# Altium PCB Set Timer.PcbDoc
Units mm, origin at the board's own origin, x right, y up, seen from the top; angles counter-clockwise.
Board outline 45 x 45 mm, 2 copper layers (Top Layer, Bottom Layer), stack 1.1 mm thick; 17 components, 17 nets, 68 pads, 10 vias.
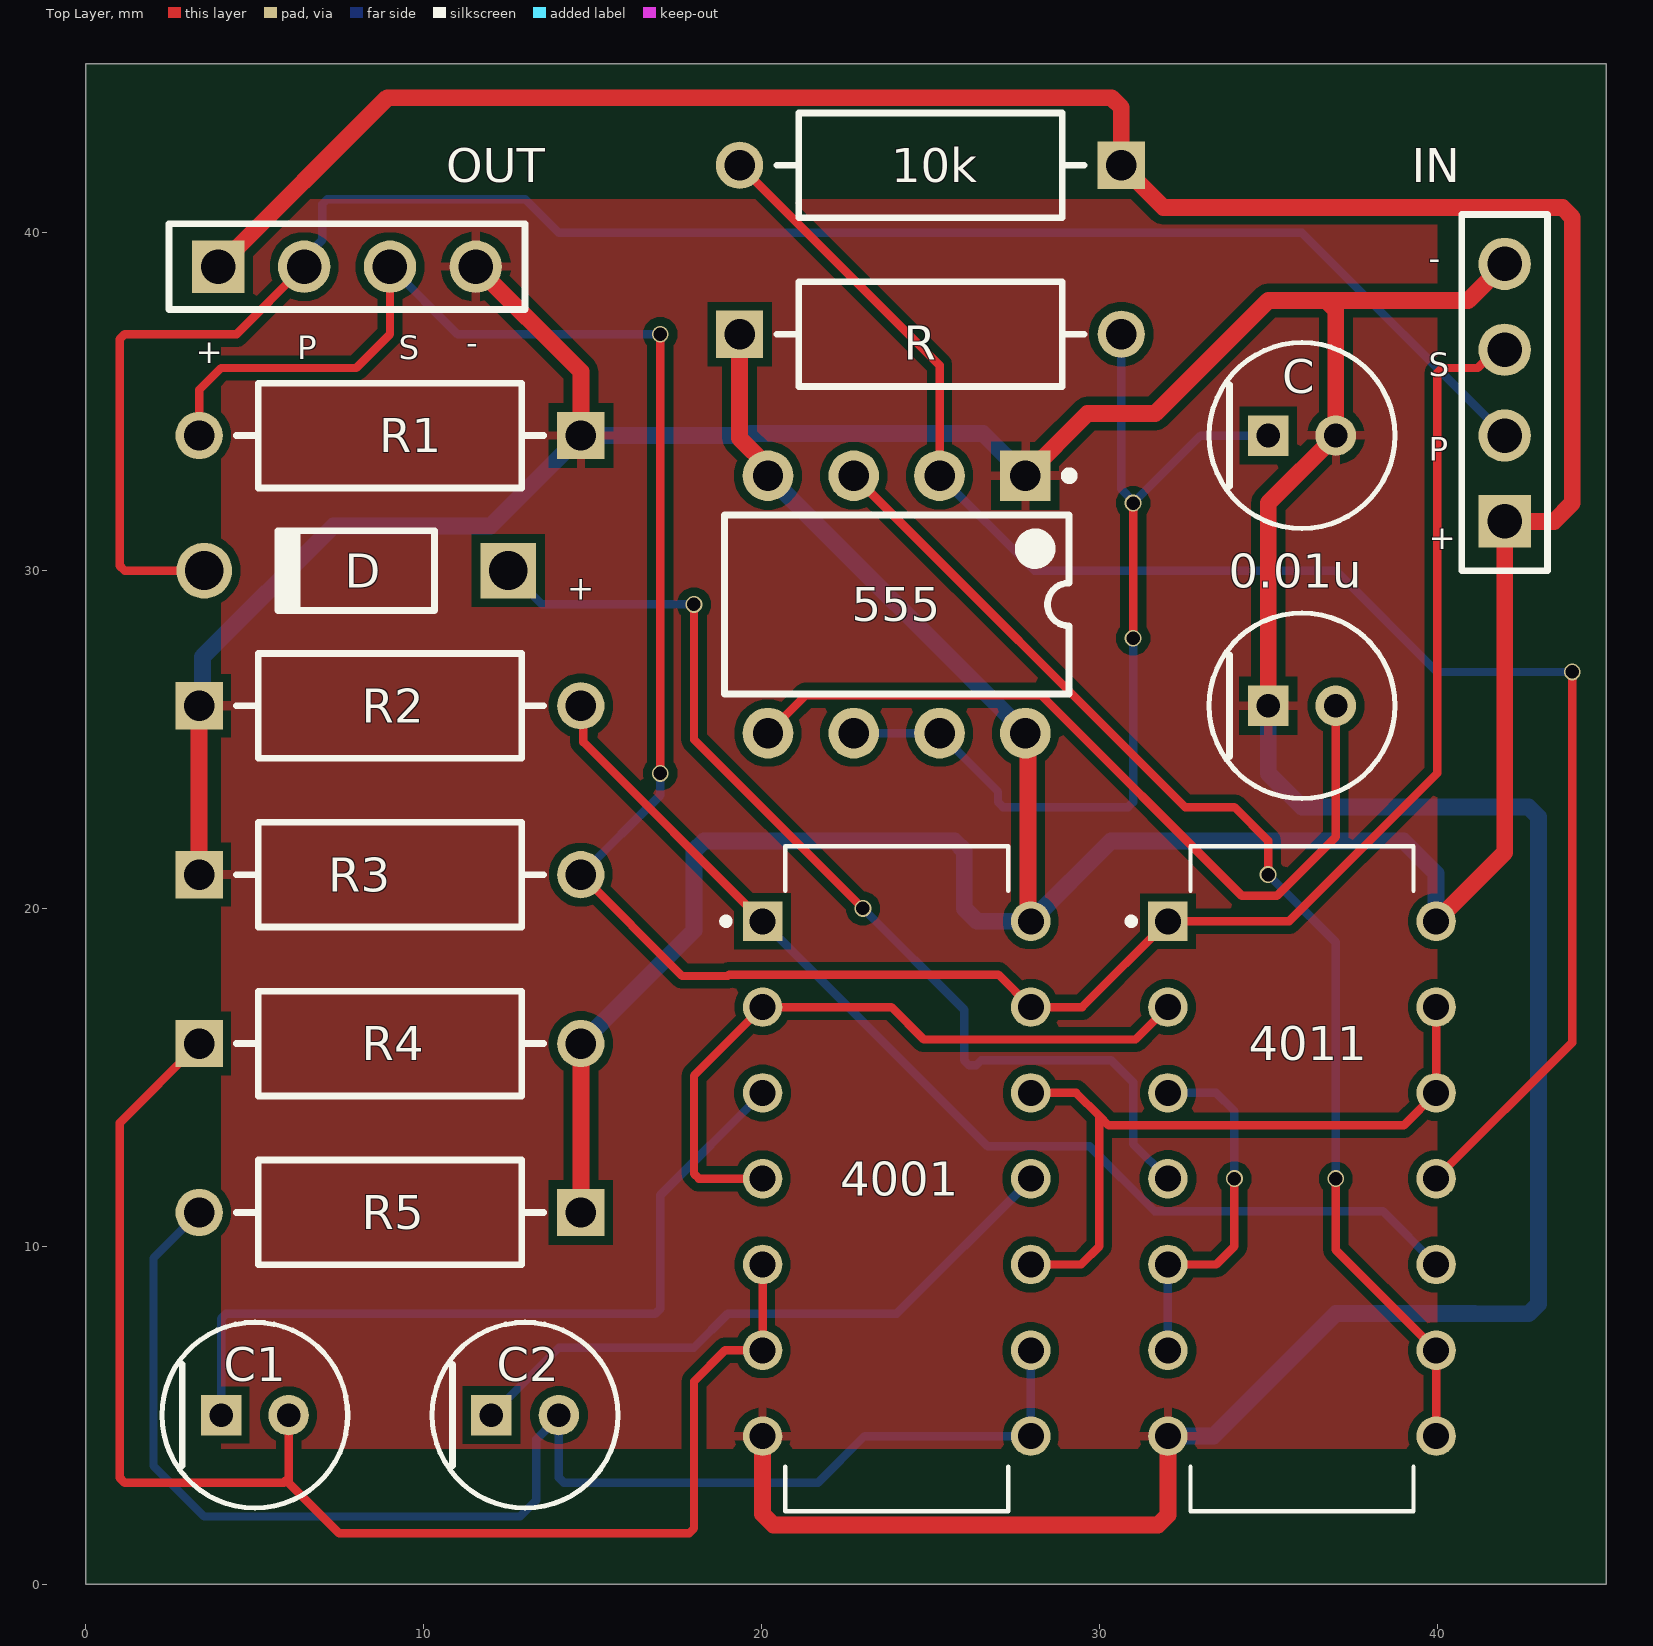
[diagram p0: Top Layer view]
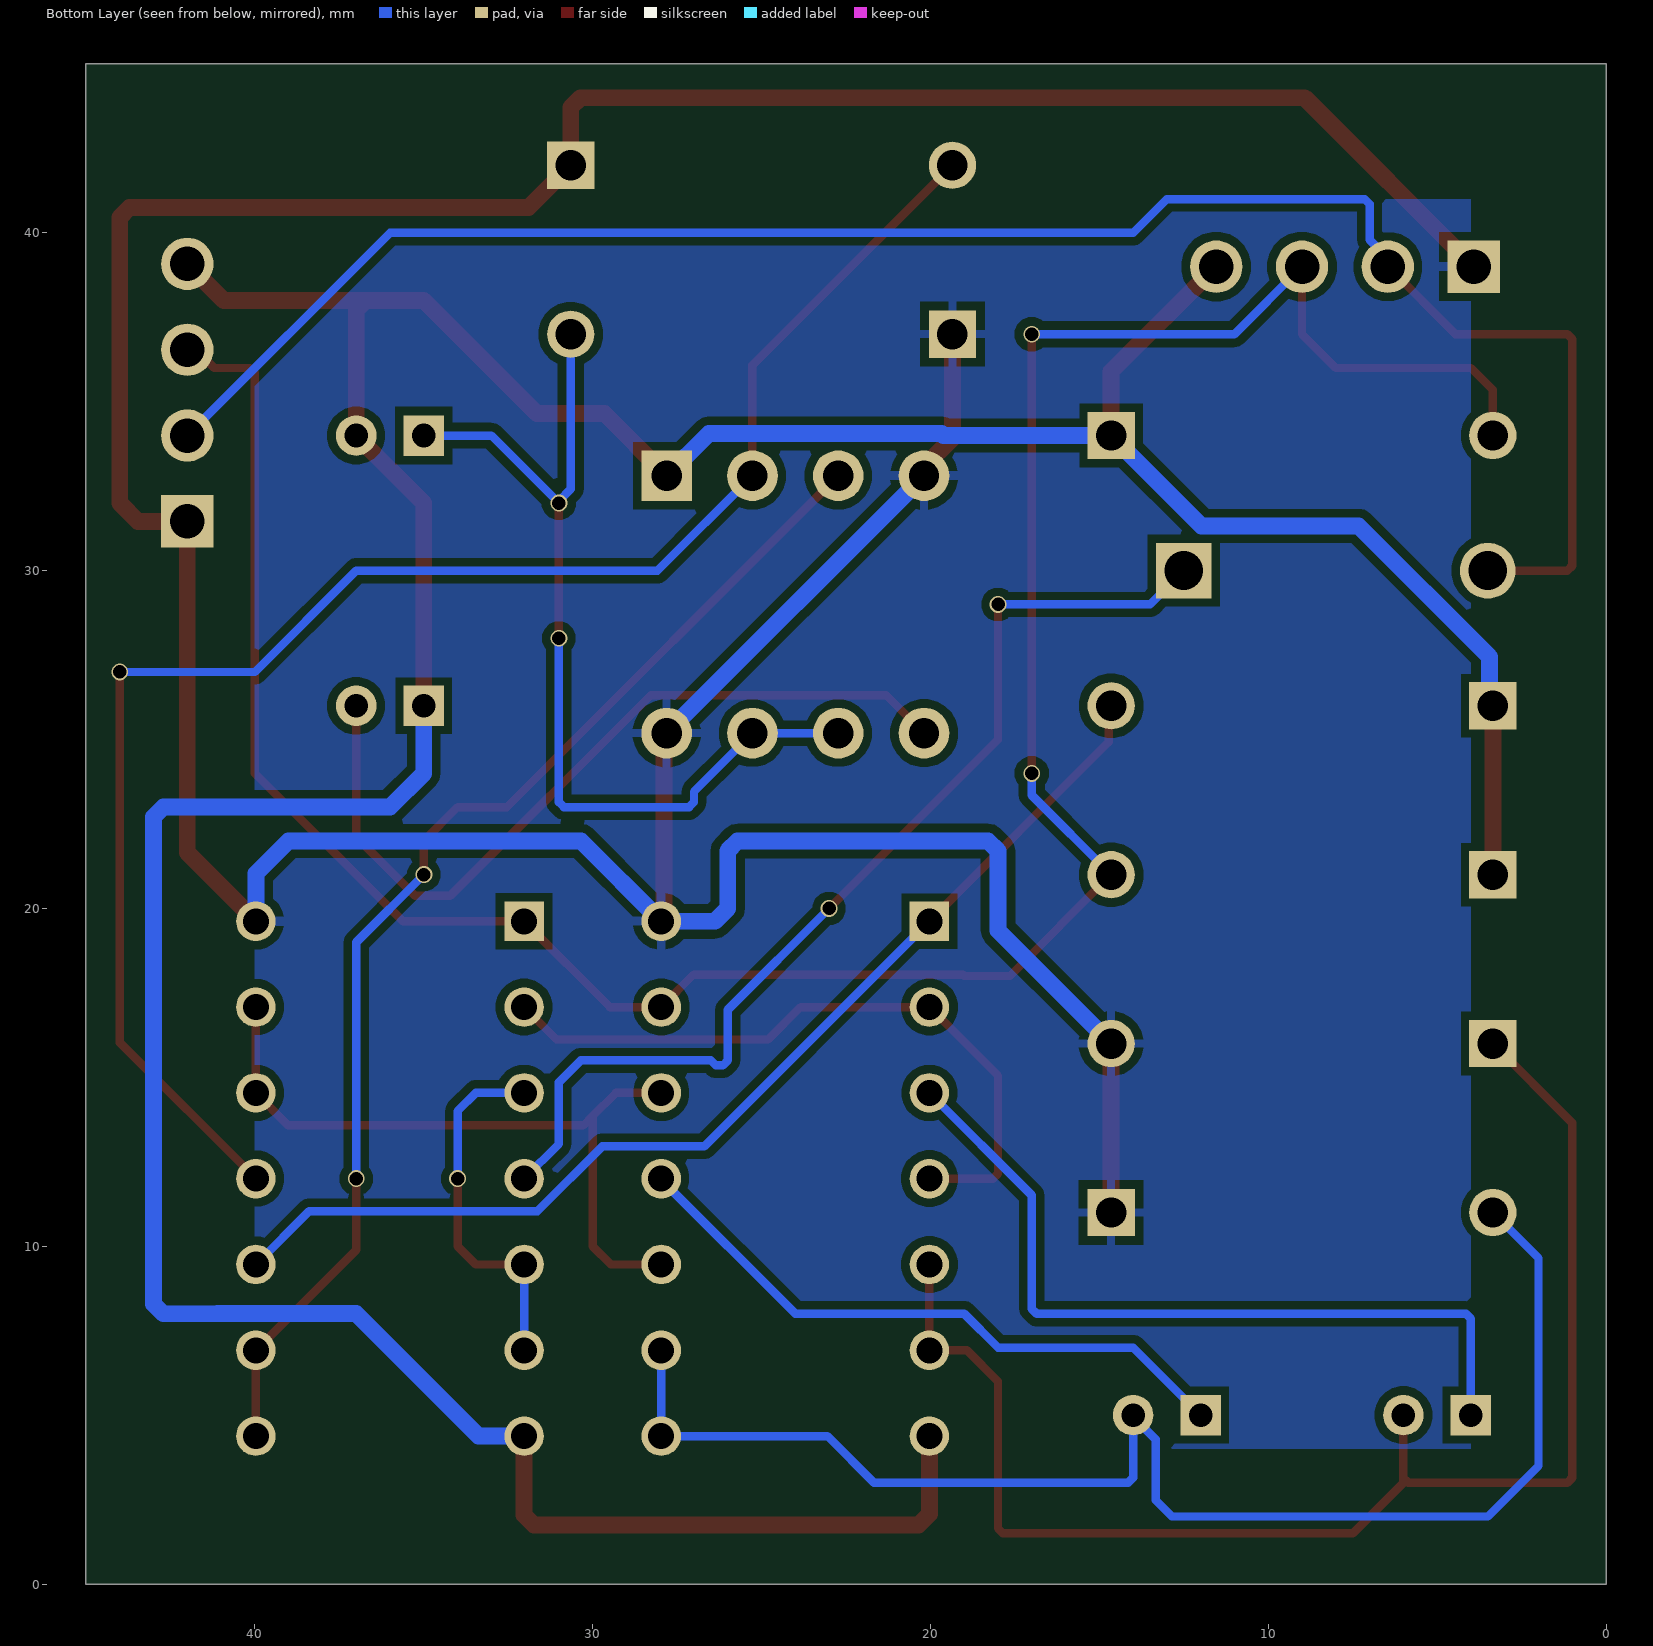
[diagram p1: Bottom Layer view, seen from below]
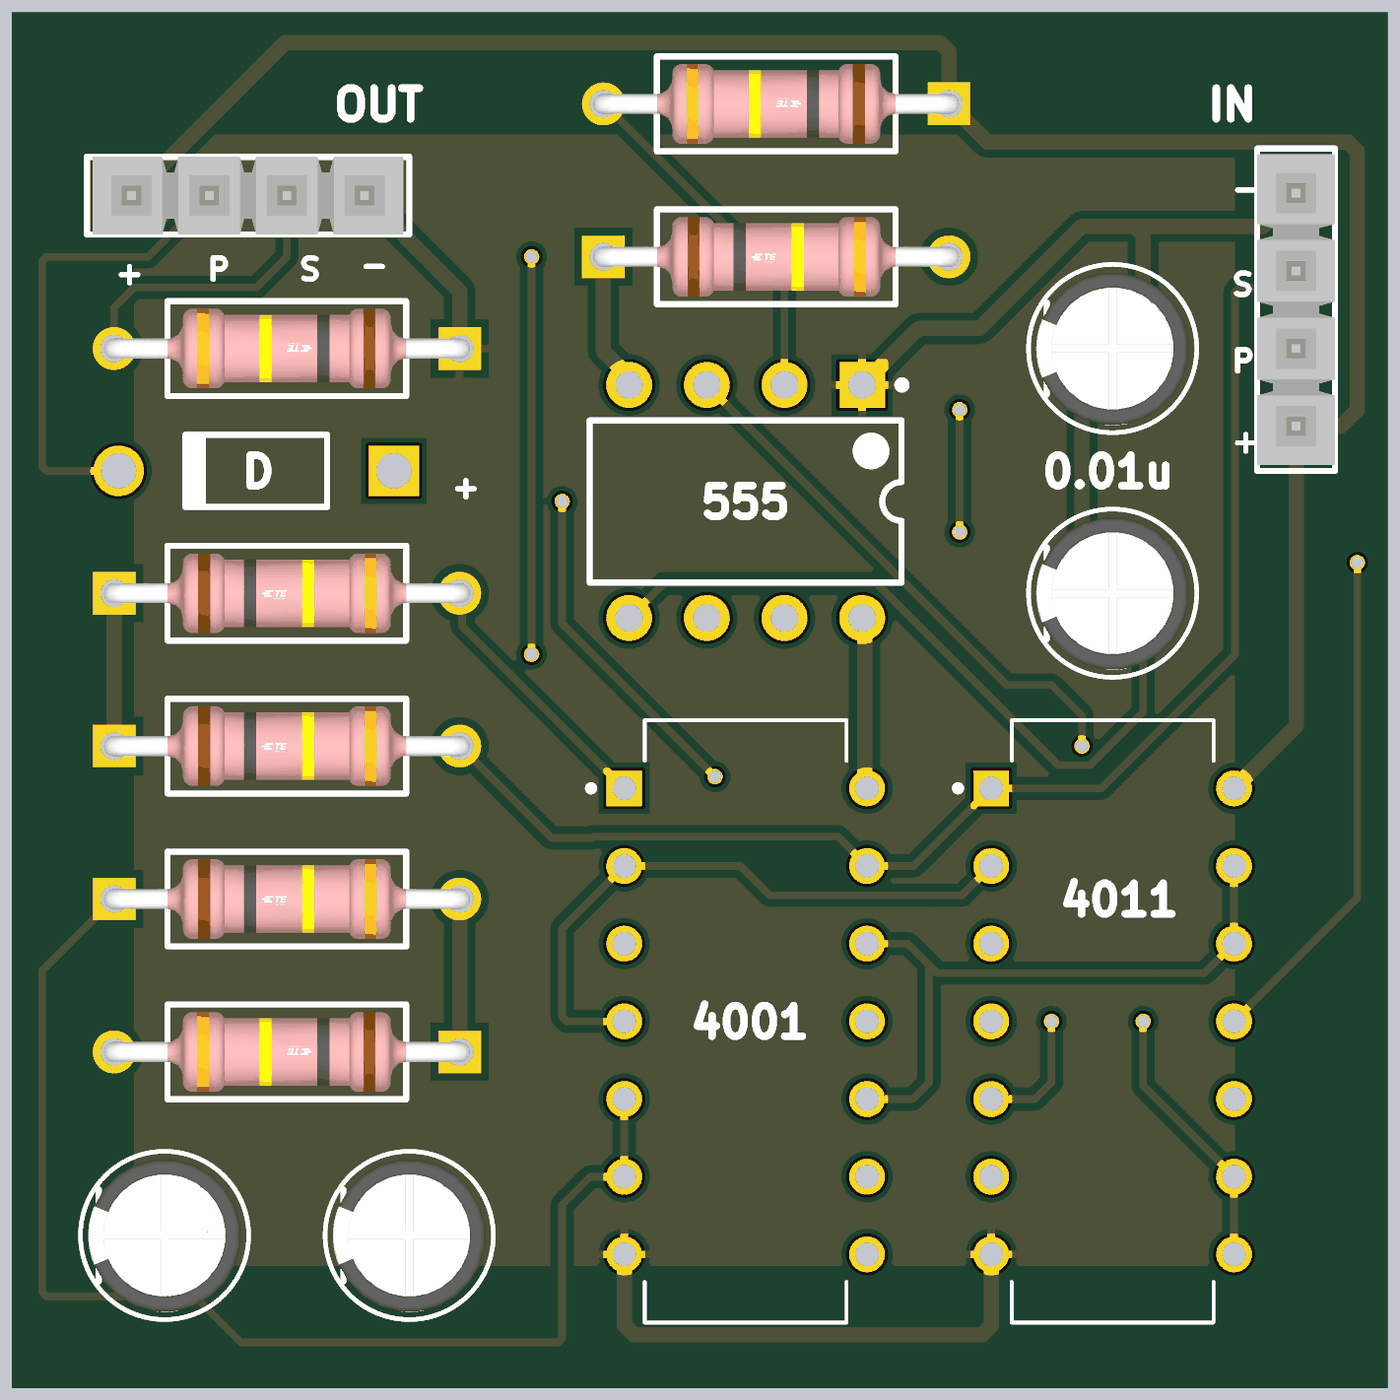
[diagram p2: 3D render of the assembled board from above, using the file's embedded part models]

## Layer stack, top to bottom
Top Solder: solder mask 0.0254, SM-001, Dk 4
Top Layer: signal copper 0.1
Dielectric 1: dielectric 0.9, FR-4, Dk 4.8
Bottom Layer: signal copper 0.1
Bottom Solder: solder mask 0.0254, SM-001, Dk 4

## Board outline
0,0 45,0 45,45 0,45

## Design rules (kind name [scope] priority, off if disabled: settings)
Clearance [All] p1: gap=0.25 ignorepadtopadclearanceinfootprint=FALSE
PolygonConnect [All] p1: connectstyle=Relief reliefconductorwidth=0.254 reliefentries=4 polygonreliefangle="90 Angle" airgapwidth=0.254
RoutingVias [All] p1: holewidth=0.4 width=0.5 viastyle="Through Hole" minholewidth=0.4 minwidth=0.5 maxholewidth=0.4 maxwidth=0.5
SolderMaskExpansion [All] p1: expansion=0.102 istentingtop=FALSE
Width Width_Power [(InNet('GND') OR InNet('VCC'))] p1: maxlimit=0.6 minlimit=0.3 preferedwidth=0.5
Width [All] p2: maxlimit=0.3 minlimit=0.2 preferedwidth=0.25
30 further rules are at their usual default settings.

## Components (designator, comment, footprint, x,y, rotation, side; value= is the part's Value field where it differs from the comment)
0.01u "EEUHD1H330" FP-RAD-TH-D_5_0_5-L_11_1-MFG 36,26 r0 top
10k "RR01J100KTB" FP-RR01-MFG 25,42 r180 top
555 "NE555P" P0008A 24,29 r270 top
4001 "CD4001BE" DIP794W45P254L1969H508Q14 24,12 r0 top
4011 "CD4011BE" DIP794W45P254L1969H508Q14 36,12 r0 top
C "EEUHD1H330" FP-RAD-TH-D_5_0_5-L_11_1-MFG 36,34 r0 top
C1 "EEUHD1H330" FP-RAD-TH-D_5_0_5-L_11_1-MFG 5,5 r0 top
C2 "EEUHD1H330" FP-RAD-TH-D_5_0_5-L_11_1-MFG 13,5 r0 top
D "1N4001-T" DIOD-DO-41-P-2_V 8,30 r180 top
IN "TSW-104-08-L-S" SMTC-TSW-104-08-X-S 42,31.46 r90 top
OUT "TSW-104-08-L-S" SMTC-TSW-104-08-X-S 3.92,39 r0 top
R "RR01J100KTB" FP-RR01-MFG 25,37 r0 top
R1 "RR01J100KTB" FP-RR01-MFG 9,34 r180 top
R2 "RR01J100KTB" FP-RR01-MFG 9,26 r0 top
R3 "RR01J100KTB" FP-RR01-MFG 9,21 r0 top
R4 "RR01J100KTB" FP-RR01-MFG 9,16 r0 top
R5 "RR01J100KTB" FP-RR01-MFG 9,11 r180 top

## Footprints (in the part's own frame and the unit in brackets; to place one, negate y for a bottom-side part, rotate by r counter-clockwise, add the part's x,y. Pads: shape width x height; smd on the part's side, far side on the other; paste and mask are expansions set on the pad)
DIOD-DO-41-P-2_V [mm] "2-Leads, Axial Lead, Body 4.635x2.36mm, Pin Spacing 9mm"
  rect 1.65x1.65 hole 1.15: 1(-4.5,0)
  round 1.65 hole 1.15: 2(4.5,0)
  silkscreen extent -2.32,-1.18 2.32,1.18, body extent -4.93,-1.18 4.93,1.18, height 2.35
DIP794W45P254L1969H508Q14 [mm]
  rect 1.17x1.17 hole 0.77: 1(-3.97,7.62)
  round 1.17 hole 0.77: 2(-3.97,5.08) 3(-3.97,2.54) 4(-3.97,0) 5(-3.97,-2.54) 6(-3.97,-5.08) 7(-3.97,-7.62) 8(3.97,-7.62) 9(3.97,-5.08) 10(3.97,-2.54) 11(3.97,0) 12(3.97,2.54) 13(3.97,5.08) 14(3.97,7.62)
  silkscreen extent -5.15,-9.84 3.3,9.84
FP-RAD-TH-D_5_0_5-L_11_1-MFG [mm]
  rect 1.2x1.2 hole 0.7 paste-1000 mask+0: 1(-1,0)
  round 1.2 hole 0.7 paste-1000 mask+0: 2(1,0)
  silkscreen extent -2.75,-2.75 2.75,2.75, body extent -2.85,-2.85 2.85,2.85, height 0.25
FP-RR01-MFG [mm]
  rect 1.4x1.4 hole 0.9 paste-1000 mask+0: 1(-5.65,0)
  round 1.4 hole 0.9 paste-1000 mask+0: 2(5.65,0)
  silkscreen extent -4.55,-1.55 4.55,1.55, body extent -6.45,-1.65 6.45,1.65, height 0.25
P0008A [mm] "DIP, 8-Leads, Body 10.15x6.6mm, Pitch 2.54mm"
  rect 1.5x1.5 hole 0.9: 1(-3.81,3.81)
  round 1.5 hole 0.9: 2(-3.81,1.27) 3(-3.81,-1.27) 4(-3.81,-3.81) 5(3.81,-3.81) 6(3.81,-1.27) 7(3.81,1.27) 8(3.81,3.81)
  silkscreen extent -3.93,-5.1 2.65,5.24, body extent -3.95,-5.07 3.95,5.07, height 5.08
SMTC-TSW-104-08-X-S [mm] ".025 SQ Post Terminal Strip Assembly, 1x4 Pins, Vertical, 2.54mm Pitch, Male"
  rect 1.55x1.55 hole 1.02: 1(0,0)
  round 1.55 hole 1.02: 2(2.54,0) 3(5.08,0) 4(7.62,0)
  silkscreen extent -1.46,-1.27 9.08,1.27, body extent -1.27,-1.27 8.89,1.27, height 8.38

## Part data
0.01u C C1 C2: library part CMP-05427-001662-1, "Aluminum Electrolytic Capacitors (Radial Lead Type) AEC-Q200 Qualified 33uF ±20% 50V", Capacitance=33uF, Case/Package=Radial, Max Operating Temperature=105°C, Min Operating Temperature=-55°C, Package Quantity=200, Ripple Current=90mA, Tolerance=20%, Voltage=50V, Construction=RADIAL, Diameter=5mm, Height=11mm, Height - Seated (Max)=0.492inch, Lead Diameter=0.5mm, Lead Pitch=2.5mm, Lead/Base Style=Straight, Length=11mm, Life (Hours)=1000Hour, Mount="Through Hole", Packaging=Bulk, Polarity=Polar, REACH SVHC="No SVHC", Ripple Current (AC)=90mA, RoHS Compliant=Yes, Series=HD, Termination=Radial, Voltage Rating=50V, Voltage Rating (DC)=50V
10k R R1 R2 R3 R4 R5: library part CMP-03212-000008-1, "RES 100K OHM 5% 1W AXIAL", Case/Package=Metal, Max Operating Temperature=155°C, Min Operating Temperature=-55°C, Number of Resistors=1, Package Quantity=5000, Power Rating=1W, Resistance=100kR, Resistor Type="Power resistor", Temperature Coefficient=300ppm/°C, Tolerance=5%, Voltage Rating=350V, Diameter=2.6mm, ELV=Compliant, Length=6.8mm, Mount=Axial, Number of Terminations=2, Packaging="Ammo Pack", RoHS Compliant=Yes, Series=RR, Termination=Axial
555: library part CMP-2000-04954-1, "Precision Timer, 4.5 to 16 V, 0 to 70 degC, 8-Pin DIP, Pb-Free, Tube", Manufacturer=TexasInstruments, Maximum High Level Output Current=-200mA, Maximum Low Level Output Current=200mA, Operating Supply Voltage=5, Package=8PDIP, Package Description="8-Pin Double In-line Package, Body 9.59 x 6.35 mm, Pitch 2.54 mm", Package Reference=P8, Category=Timer, Datasheet URL=http://www.ti.com/general/docs/lit/getliterature.tsp?genericPartNumber=NE555&fileType=pdf, Datasheet Version="Rev. I, 09/2014", Manufacturer URL=http://www.ti.com/, Number of Internal Timers=1, Package URL=http://www.ti.com/lit/ml/mpdi001b/mpdi001b.pdf, Packaging=Rail/Tube, Rad Hard=No, Type=Standard
4001: "CMOS Quad 2-Input NOR Gate 14-PDIP -55 to 125", Package="PDIP-14 Texas Instruments", Availability=Unavailable, DigiKey-Purchase-URL=https://snapeda.com/shop?store=DigiKey&id=2748659, MF="Texas Instruments", Mouser-Purchase-URL=https://snapeda.com/shop?store=Mouser&id=2748659, MP=CD4001BE, Price=None, SnapEDA_Link=https://www.snapeda.com/parts/CD4001BE/Texas%20Instruments/view-part/2748659/?ref=snap, Texas_Instruments-Purchase-URL=https://snapeda.com/shop?store=Texas+Instruments&id=2748659
4011: Package=None, Availability=Unavailable, MP=CD4011BE, Price=None
D: library part CMP-0639-00006-2, "1.0 A Rectifier, 15 pF, 50 V, -65 to 150 degC, 2-Pin DO-41 Plastic, RoHS, Tape and Reel", Manufacturer="Diodes Inc", Max. Average Rectified Current IO (A)=1, Operating Temperature Range (degC)="-65 to 150", ComponentLink1Description="Manufacturer URL", ComponentLink1URL=http://diodes.com/, ComponentLink2Description=Datasheet, ComponentLink2URL=http://diodes.com/datasheets/ds28002.pdf, CT (pF)=15, DatasheetVersion="Rev. 8-2", Max. IFSM (A)=30, Max. IR (uA)=5, Mounting Technology="Through Hole", PackageDescription="2-Pin Axial Lead, Body 4.635 x 2.36 mm, Lead Spread 25.4 mm", PackageReference=DO-41-P-2, Packing="Tape and Reel", PartNumber=1N4001-T, RoHS=TRUE, VF (V)=1, VRRM (V)=50
IN OUT: library part CMP-1024-00358-1, "0.025\" SQ Post Header, Through-hole, Vertical, -55 to 125 degC, 2.54 mm Pitch, 4-Pin, Male, RoHS", Manufacturer=Samtec, Temperature Range="-55 to 125 degC", ComponentLink1Description="Manufacturer URL", ComponentLink1URL=http://www.samtec.com, ComponentLink2Description=Datasheet, ComponentLink2URL=http://www.samtec.com/documents/webfiles/pdf/TSW_TH.PDF, ComponentLink3Description="Package Specification", ComponentLink3URL=http://www.samtec.com/documents/webfiles/cpdf/TSW-XXX-XX-XXX-X-XX-XXX-MKT.pdf, DatasheetVersion=F-214, Mounting Technology=Through-hole, Orientation=Vertical, PackageDescription=".025[0.64] SQ. Post Terminal Strip Assembly", PackageReference=TSW-104-08-X-S, PackageVersion="DM, 8/1988", PartNumber=TSW-104-08-L-S, Pitch="2.54 mm", RoHS=True

## Via types
v1: diameter 0.5, hole 0.4, Top Layer to Bottom Layer, 10 vias

## Nets (pads, with @x,y where several pads share a name; then routed paths per layer and width w, separated by ;. In a path a pad name is that pad's centre, name@x,y a point inside that pad or via, vN(x,y) a via of type N, cw(c..) or ccw(c..) an arc to the next point about the centre after c; other vN are vias at no path point)
GND: 0.01u.1 555.1 4001.7 4011.7 C.2 IN.4 OUT.4 R1.1 R2.1 R3.1 | length 124.6
  Top Layer w0.5: R3.1 R2.1 ; OUT.4 14.65,35.89 R1.1 ; 4001.7 20.03,2.073 20.353,1.75 31.737,1.75 32.03,2.043 4011.7 ; 555.1 29.655,34.655 31.655,34.655 35,38 36.707,38 ; 0.01u.1 35,32 C.2 37,37.707 36.707,38 ; IN.4 40.92,38 36.707,38
  Bottom Layer w0.5: R2.1 3.45,26.1 3.45,27.45 7.325,31.325 11.975,31.325 R1.1 19.612,34 19.672,34.06 26.56,34.06 555.1 ; 4011.7 33.38,4.38 37.005,8.005 41.111,8.005 41.116,8 42.707,8 43,8.293 43,22.707 42.707,23 36,23 35,24 0.01u.1
Net0.01u_2: 0.01u.2 555.5 | length 24.3
  Top Layer w0.25: 555.5 21.315,26.315 28.276,26.315 34.214,20.377 35.257,20.377 37,22.12 0.01u.2
Net10k_2: 10k.2 555.2 4011.11 | length 49.4
  Top Layer w0.25: 10k.2 25.27,36.08 555.2 ; 4011.11 44,16.03 v1(44,27)
  Bottom Layer w0.25: 555.2 28.08,30 37,30 40,27 v1(44,27)
Net555_3: 555.3 4011.8 4011.9 | length 36.4
  Top Layer w0.25: 555.3 32.54,23 34,23 35,22 35,21.004 v1(34.998,21.002) ; v1(37,12) 37,9.89 4011.9 4011.8
  Bottom Layer w0.25: v1(34.998,21.002) 37,19 v1(37,12)
Net555_6: 555.6 555.7 C.1 R.2 | length 28.2
  Top Layer w0.25: v1(31,28) v1(31,32)
  Bottom Layer w0.25: 555.6 555.7 27,23.46 27,23.146 27.146,23 30.854,23 31,23.146 v1(31,28) ; R.2 30.65,32.418 31,32.068 v1(31,32) 33,34 C.1
Net4001_1: 4001.1 4011.10 R2.2 | length 32.8
  Top Layer w0.25: R2.2 14.725,25.925 14.725,24.925 4001.1
  Bottom Layer w0.25: 4001.1 26.69,12.96 29.712,12.96 31.632,11.04 38.39,11.04 4011.10
Net4001_2: 4001.2 4001.4 4011.2 | length 20.7
  Top Layer w0.25: 4001.4 18.146,12 18,12.146 18,15.05 4001.2 23.843,17.08 24.803,16.12 31.07,16.12 4011.2
Net4001_3: 4001.3 C1.1 | length 23.6
  Bottom Layer w0.25: C1.1 4,7.854 4.146,8 16.854,8 17,8.146 17,11.51 4001.3
Net4001_5: 4001.5 4001.6 C1.2 R4.1 | length 42.8
  Top Layer w0.25: R4.1 1,13.65 1,3.146 1.146,3 5.854,3 5.927,3.073 ; C1.2 6,3 7.5,1.5 17.854,1.5 18,1.646 18,6 18.92,6.92 4001.6 4001.5
Net4001_8: 4001.8 4001.9 C2.2 R5.2 | length 42
  Bottom Layer w0.25: R5.2 2,9.65 2,3.5 3.5,2 12.854,2 13.336,2.482 13.336,4.285 C2.2@14,4.949 ; C2.2 C2.2@14,4.949 ; 4001.9 4001.8 23.051,4.38 21.671,3 14.146,3 14,3.146 C2.2@14,4.949
Net4001_10: 4001.10 4001.12 4011.12 4011.13 | length 21.4
  Top Layer w0.25: 4001.10 29.46,9.46 30,10 30,13.854 ; 4001.12 29.314,14.54 30,13.854 ; 4011.13 4011.12 39.01,13.58 30.274,13.58 30,13.854
Net4001_11: 4001.11 C2.1 | length 18.9
  Bottom Layer w0.25: C2.1 14,7 18,7 19,8 24,8 27.97,11.97 4001.11
Net4011_3: 4011.3 4011.5 4011.6 | length 10.9
  Top Layer w0.25: 4011.5 33.46,9.46 34,10 v1(34,12)
  Bottom Layer w0.25: 4011.6 4011.5 ; 4011.3 33.46,14.54 34,14 v1(34,12)
Net4011_4: 4011.4 D.1 | length 31.4
  Top Layer w0.25: v1(18,29) 18,25 v1(23,20)
  Bottom Layer w0.25: D.1 13.5,29 v1(18,29) ; v1(23,20) 26,17 26,15.5 26.146,15.354 26.354,15.354 26.5,15.5 30.354,15.5 31,14.854 31,13.03 4011.4
Pulse: D.2 IN.2 OUT.2 | length 55.7
  Top Layer w0.25: D.2 1.146,30 1,30.146 1,36.854 1.146,37 4.46,37 OUT.2
  Bottom Layer w0.25: OUT.2 6.46,39.256 7,39.796 7,40.854 7.146,41 13,41 14,40 36,40 IN.2
Status: 4001.13 4011.1 IN.3 OUT.3 R1.2 R3.2 | length 79.5
  Top Layer w0.25: R1.2 3.35,35.35 4,36 8,36 9,37 OUT.3 ; R3.2 17.65,18 19,18 19.04,18.04 27.01,18.04 4001.13 29.49,17.08 4011.1 35.62,19.62 40,24 40,35.854 40.146,36 41.204,36 41.744,36.54 IN.3 ; v1(17,24) v1(17,37)
  Bottom Layer w0.25: OUT.3 11,37 v1(17,37) ; R3.2 17,23.35 v1(17,24)
VCC: 10k.1 555.4 555.8 4001.14 4011.14 IN.1 OUT.1 R4.2 R5.1 R.1 | length 127.9
  Top Layer w0.5: OUT.1 8.92,44 30.357,44 30.65,43.707 10k.1 31.9,40.75 43.707,40.75 44,40.457 44,32 43.46,31.46 IN.1 42,21.65 4011.14 ; R5.1 R4.2 ; R.1 19.35,33.921 20.19,33.081 555.4 ; 555.8 27.89,25.11 27.89,19.7 4001.14
  Bottom Layer w0.5: R4.2 18,19.35 18,21.707 18.293,22 25.707,22 26,21.707 26,20 26.38,19.62 4001.14 30.35,22 39,22 39.97,21.03 4011.14 ; 555.4 555.8

## Polygon pours and split planes (outlines as drawn)
GND on Top Layer "GND_L01_P000" (solid, remove dead copper, pour order 0): 4,41 4,4 41,4 40,5 40,41
VCC on Bottom Layer "VCC_L02_P001" (solid, remove dead copper, pour order 1): 4,41 4,4 40,4 40,41

## Silkscreen, mask and mechanical layers (free items; w line width, h text height)
Top Overlay:
  text "-" at 39.754,38.904 h0.7
  text "-" at 11.254,36.404 h0.7
  text "P" at 6.254,36.254 h0.7
  text "S" at 9.254,36.254 h0.7
  text "+" at 3.254,36.137 h0.7
  text "S" at 39.754,35.754 h0.7
  text "P" at 39.754,33.254 h0.7
  text "+" at 39.754,30.637 h0.7
  text "+" at 14.254,29.137 h0.7